# Altium PCB sensor_pcb_v0.1.PcbDoc
Units mm, origin at the board's own origin, x right, y up, seen from the top; angles counter-clockwise.
Board outline 56 x 106 mm, 2 copper layers (Top Layer, Bottom Layer), stack 1.471 mm thick; 2 components, 0 nets, 13 pads, 0 vias.
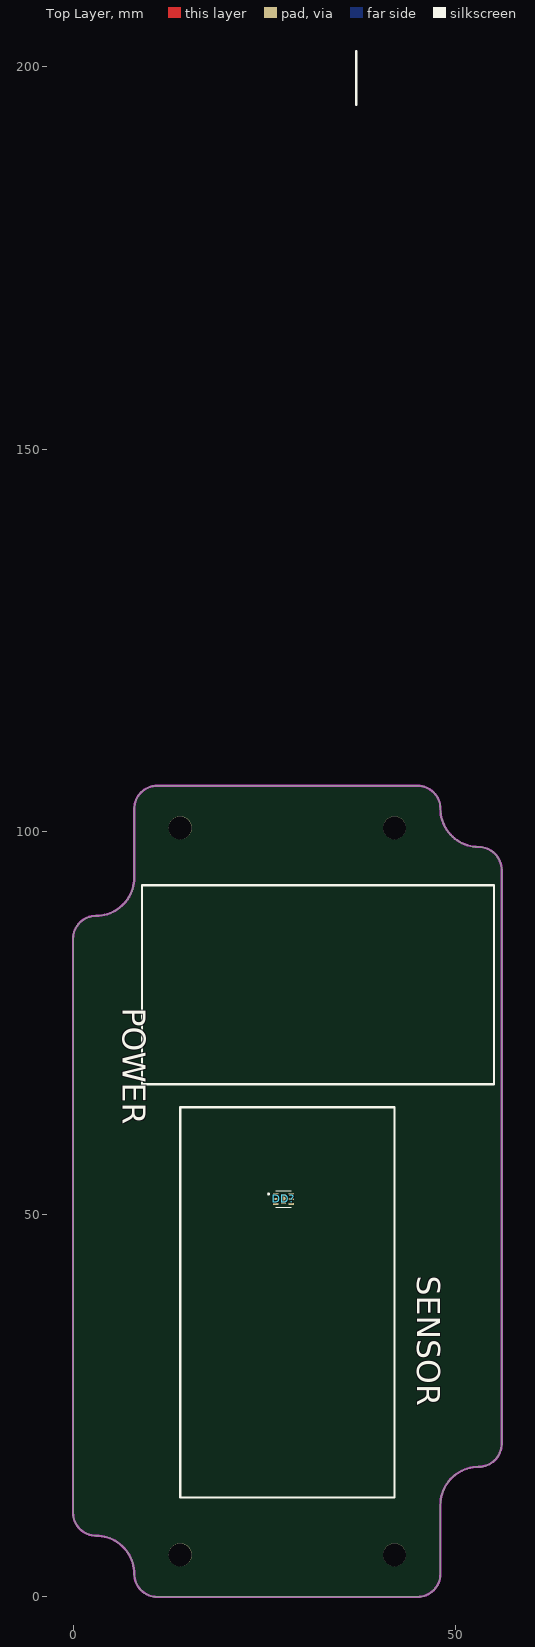
[diagram p0: Top Layer view]
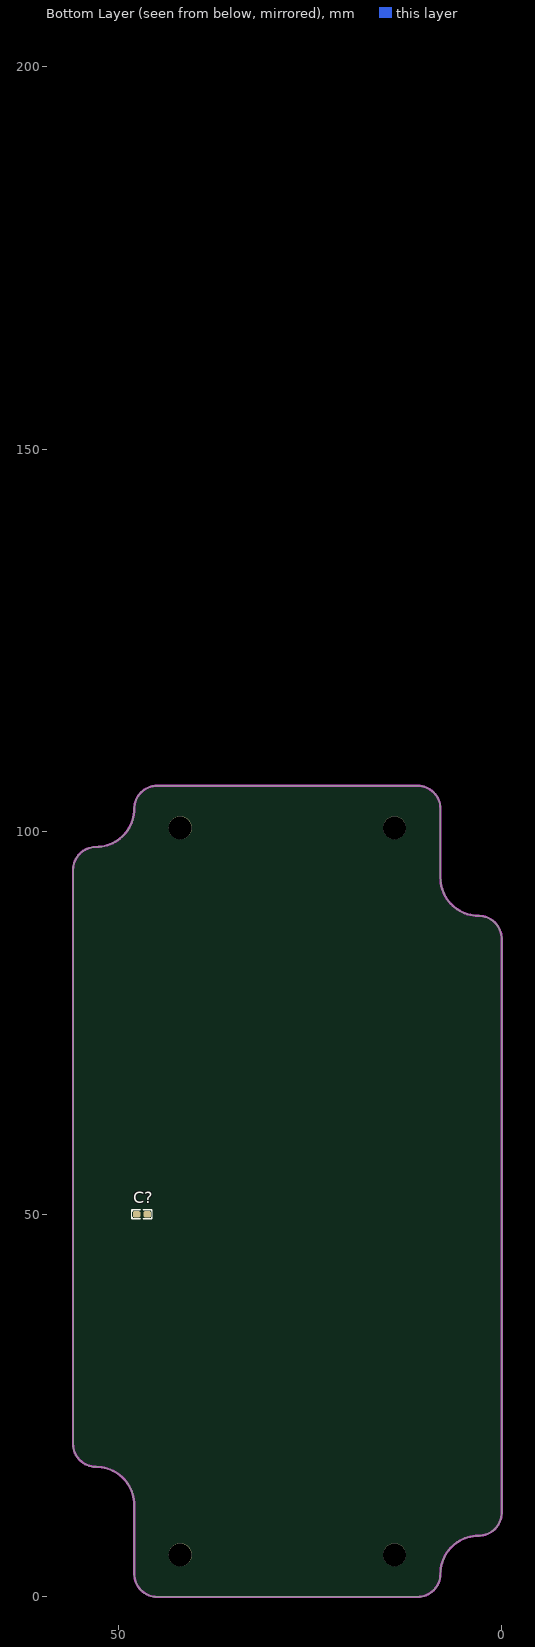
[diagram p1: Bottom Layer view, seen from below]

## Layer stack, top to bottom
Top Solder: solder mask 0.0102, Solder Resist, Dk 3.5
Top Layer: signal copper 0.0356
Dielectric 1: dielectric 1.4, FR-4, Dk 4.8
Bottom Layer: signal copper 0.0356
Bottom Solder: solder mask 0.0102, Solder Resist, Dk 3.5

## Board outline
3,8 cw(c3,3) 8,3 ccw(c11,3) 11,0 45,0 ccw(c45,3) 48,3 48,12 cw(c53,12) 53,17 ccw(c53,20) 56,20 56,95 ccw(c53,95) 53,98 cw(c53,103) 48,103 ccw(c45,103) 45,106 11,106 ccw(c11,103) 8,103 8,94 cw(c3,94) 3,89 ccw(c3,86) 0,86 0,11 ccw(c3,11)

## Design rules (kind name [scope] priority, off if disabled: settings)
Clearance [All] p1: gap=0.254
PolygonConnect [All] p1: connectstyle=Relief reliefconductorwidth=0.254 reliefentries=4 polygonreliefangle="90 Angle" airgapwidth=0.254
RoutingVias [All] p1: holewidth=0.711 width=1.27 viastyle="Through Hole" minholewidth=0.711 minwidth=1.27 maxholewidth=0.711 maxwidth=1.27
SolderMaskExpansion [All] p1: expansion=0.102
Width [All] p1: maxlimit=0.254 minlimit=0.254 preferedwidth=0.254
30 further rules are at their usual default settings.

## Classes and differential pairs
component class sensor_pcb_v0.1: C?

## Components (designator, comment, footprint, x,y, rotation, side; value= is the part's Value field where it differs from the comment)
C? "100nF" C0603 47,50 r180 bottom
DD? "OPT3001DNPR" SON65P200X200X65-7N 27.5,52 r0 top

## Footprints (in the part's own frame and the unit in brackets; to place one, negate y for a bottom-side part, rotate by r counter-clockwise, add the part's x,y. Pads: shape width x height; smd on the part's side, far side on the other; paste and mask are expansions set on the pad)
C0603 [mm] "CHIP Capacitor, 1.6X0.8mm, 0603"
  rrect50% 1x0.8 smd mask+0.075: 1(-0.7,0) 2(0.7,0)
  silkscreen extent -1.33,-0.6 1.32,0.6, body extent -0.8,-0.4 0.8,0.4, height 0.9
SON65P200X200X65-7N [mm]
  rrect25% 0.74x0.27 smd: 1(-0.995,0.65) 2(-0.995,0) 3(-0.995,-0.65) 4(0.995,-0.65) 5(0.995,0) 6(0.995,0.65)
  rect 0.65x1.35 smd paste-2: 7(0,0)
  silkscreen extent -2.03,-1.1 1,1.1, body extent -1,-1 1,1, height 0.65

## Part data
C?: library part CAP_SMD_MLCC, "CAP, SMD, MLCC"
DD?: "Optical Sensor Ambient 550nm IA?C 6-UDFN Exposed Pad <a href=\"https://snapeda.com/parts/OPT3001DNPR/Texas%20Instruments/view-part/?ref=eda\">Buy Part</a>"

## Free pads (board coordinates)
  round 3 hole 3 unplated mask+0: 0(14,5.5) 0(14,100.5) 0(42,5.5) 0(42,100.5)

## Nets (pads, with @x,y where several pads share a name; then routed paths per layer and width w, separated by ;. In a path a pad name is that pad's centre, name@x,y a point inside that pad or via, vN(x,y) a via of type N, cw(c..) or ccw(c..) an arc to the next point about the centre after c; other vN are vias at no path point)
pads on no net: C?.1 C?.2 DD?.1 DD?.2 DD?.3 DD?.4 DD?.5 DD?.6 DD?.7

## Keep-outs
Keep-Out Layer:
  the board outline again, w0.3

## Silkscreen, mask and mechanical layers (free items; w line width, h text height)
Top Overlay:
  lines w0.3: 37,195 37,202 ; 9,67 9,93 55,93 55,67 9,67 ; 14,13 42,13 42,64 14,64 14,13
  text "POWER" at 6.5,77 h3 r270
  text "SENSOR" at 45,42 h3 r270